# Altium PCB 电子脚铐便携式主控板V3-改版.PcbDoc (part 2 of 3)
Units mm, origin at the board's own origin, x right, y up, seen from the top; angles counter-clockwise.
Board outline 54 x 110 mm, 2 copper layers (Top Layer, Bottom Layer), stack 1.671 mm thick; 103 components, 64 nets, 340 pads, 43 vias.
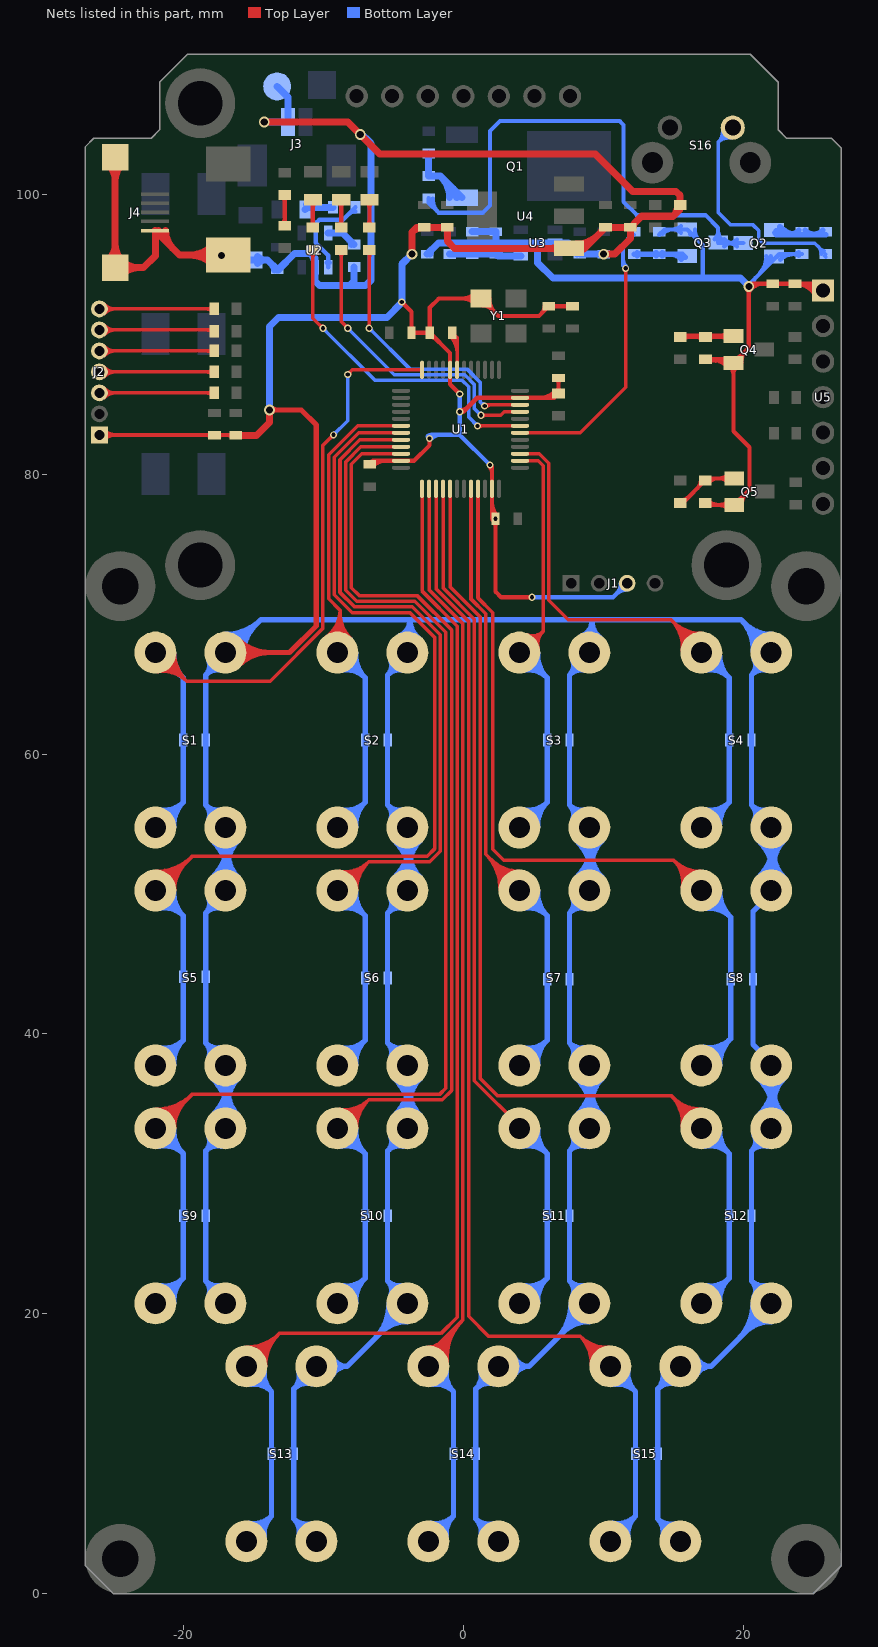
[diagram p2: the nets of this part, all layers, seen from the top]

## Via types
v1: diameter 0.508, hole 0.305, Top Layer to Bottom Layer, tented both sides, 29 vias
v2: diameter 0.762, hole 0.508, Top Layer to Bottom Layer, tented both sides, 14 vias

## Nets (pads, with @x,y where several pads share a name; then routed paths per layer and width w, separated by ;. In a path a pad name is that pad's centre, name@x,y a point inside that pad or via, vN(x,y) a via of type N, cw(c..) or ccw(c..) an arc to the next point about the centre after c; other vN are vias at no path point) (continued)
GND: C1.2 C2.2 C3.2 C4.2 C5.2 C6.2 C7.2 C8.2 C9.2 C10.2 C11.2 C12.2 C13.2 C14.2 C15.2 C16.2 C17.2 C18.2 C19.2 C20.2 C21.2 C22.2 C23.2 C24.2 C25.1 C26.2 C27.1 C28.2 C29.2 C30.2 C31.2 C32.2 C33.2 C34.2 C35.2 C36.1 D5.2 J1.3 J2.1 J3.2 J4.5 pad.@-13.3,107.7 Q2.2 Q3.2 Q4.2 Q5.2 R6.2 R13.1 R17.2 R19.2 R22.2 R23.2 R29.1 R31.1 S1.1 S2.1 S3.1 S4.1 S5.1 S6.1 S7.1 S8.1 S9.1 S10.1 S11.1 S12.1 S13.1 S14.1 S15.1 U1.8 U1.23 U1.35 U1.47 U2.2 U3.2 U4.1 U5.1 Y1.2 | length 1045
  Top Layer w0.305: J2.1@-26,82.8 C7.2@-16.4,82.8 ; J2.1@-25.683,82.484 cw(c-24.919,81.719) -24.919,82.8 cw(c-24.919,83.881) J2.1@-25.683,83.117 ; -18.368,82.8 cw(c-18.368,82.328) C6.2@-18.034,82.662 ; C6.2@-17.526,82.662 cw(c-17.192,82.328) -17.192,82.8 ; -16.844,82.8 cw(c-16.844,82.328) C7.2@-16.51,82.662 ; C4.2@-6.7,80.7 -6.45,80.95 U1.23@-4.45,80.95 -3.517,80.95 -2.413,82.054 v1(-2.413,82.55) ; C4.2@-6.661,80.811 cw(c-6.326,80.476) C4.2@-6.326,80.95 ; C4.2@-6.446,80.596 cw(c-5.59,79.74) -5.59,80.95 ; v1(-4.4,92.3) -3.7,91.6 C3.2@-3.7,90.1 C5.2@-2.4,90.1 ; C3.2@-3.804,90.354 ccw(c-4.056,90.606) -3.7,90.606 ccw(c-3.344,90.606) C3.2@-3.596,90.354 ; C3.2@-3.596,89.996 cw(c-3.344,89.744) -3.344,90.1 cw(c-3.344,90.456) C3.2@-3.596,90.204 ; C5.2@-2.504,89.996 ccw(c-2.756,89.744) -2.756,90.1 ccw(c-2.756,90.456) C5.2@-2.504,90.204 ; C5.2@-2.504,90.354 ccw(c-2.756,90.606) -2.4,90.606 ccw(c-2.044,90.606) C5.2@-2.296,90.354 ; C5.2@-2.4,89.802 cw(c-2.4,89.084) -1.892,89.592 ; v1(-0.254,84.455) 0,84.455 0.995,85.45 U1.47@4.05,85.45 6.488,85.45 R6.2@6.8,85.762 C1.2@6.8,86.862 ; v1@-0.254,84.557 ccw(c-0.254,85.415) 0.353,84.808 ; v1(-0.254,85.725) -0.95,86.421 U1.8@-0.95,87.45 -0.95,88.65 C5.2@-2.4,90.1 ; Y1.2@0.798,92.198 ccw(c-0.051,91.349) -0.051,92.55 ccw(c-0.051,93.751) Y1.2@0.798,92.902 ; Y1.2@1.35,92.052 cw(c1.35,91.093) 2.029,91.771 ; v1@1.833,80.573 cw(c1.31,80.05) 2.05,80.05 ; Y1.2@1.848,92.55 ccw(c3.29,92.55) 2.27,91.53 ; v1(1.905,80.645) 2.05,80.5 U1.35@2.05,78.95 2.05,77.05 v1(2.3,76.8) 2.3,71.6 2.7,71.2 v1(4.9,71.2) ; C2.2@2.044,77.09 ccw(c2.382,77.285) C2.2@2.317,76.9 ; C2.2@2.05,76.913 ccw(c2.413,76.913) C2.2@2.156,76.656 ; C2.2@2.05,77.174 ccw(c2.524,77.174) C2.2@2.189,76.839 ; 2.05,77.649 ccw(c3.149,77.649) C2.2@2.372,76.872 ; 2.05,77.91 ccw(c3.26,77.91) C2.2@2.404,77.054 ; C2.2@2.196,76.546 cw(c1.944,76.294) 2.3,76.294 cw(c2.656,76.294) C2.2@2.404,76.546 ; 5.47,85.45 ccw(c5.47,86.992) R6.2@6.56,85.902 ; 5.592,91.492 ccw(c5.084,92) C36.1@5.802,92 ; 6.206,85.45 ccw(c6.206,86.256) R6.2@6.776,85.686 ; C36.1@6.354,91.896 cw(c6.606,91.644) 6.606,92 cw(c6.606,92.356) C36.1@6.354,92.104 ; R6.2@6.66,85.902 ccw(c6.323,86.239) 6.8,86.239 ccw(c7.277,86.239) R6.2@6.94,85.902 ; C1.2@6.696,86.758 cw(c6.444,86.506) 6.8,86.506 cw(c7.156,86.506) C1.2@6.904,86.758 ; C25.1@7.546,91.896 ccw(c7.294,91.644) 7.294,92 ccw(c7.294,92.356) C25.1@7.546,92.104 ; C25.1@7.8,92 C36.1@6.1,92 5.4,91.3 2.5,91.3 Y1.2@1.25,92.55 -1.75,92.55 -2.4,91.9 C5.2@-2.4,90.1 ; R31.1@17.272,77.94 17.422,77.79 Q5.2@19.347,77.79 20.447,78.89 20.447,81.915 19.3,83.062 Q4.2@19.3,87.95 20.4,89.05 v2@20.4,93.298 ; R29.1@17.3,88.2 Q4.2@19.05,88.2 ; R29.1@17.499,88.029 cw(c17.851,87.419) 18.033,88.099 ; R31.1@17.512,78.08 ccw(c18.211,78.779) 18.211,77.79 ; R29.1@17.54,88.06 cw(c17.877,87.723) 17.877,88.2 cw(c17.877,88.677) R29.1@17.54,88.34 ; R29.1@17.657,88.2 cw(c17.657,86.507) Q4.2@18.854,87.704 ; 18.393,88.2 cw(c18.393,87.243) Q4.2@19.07,87.92 ; Q5.2@18.901,77.544 ccw(c18.308,76.951) 18.308,77.79 ccw(c18.308,78.629) Q5.2@18.901,78.036 ; Q4.2@19.054,87.704 cw(c18.461,87.111) 19.3,87.111 cw(c20.139,87.111) Q4.2@19.546,87.704 ; Q4.2@19.5,88.298 ccw(c19.5,88.654) Q4.2@19.752,88.402 ; Q5.2@19.547,78.138 ccw(c19.547,78.494) Q5.2@19.799,78.242 ; Q4.2@19.848,87.95 cw(c21.17,87.95) 20.235,88.885 ; Q5.2@19.895,77.79 cw(c21.217,77.79) 20.282,78.725 ; v2@20.238,93.238 cw(c19.848,92.848) 20.4,92.848 cw(c20.952,92.848) 20.562,93.238 cw(c21.435,92.365) 21.435,93.6 ; v2@20.702,93.6 C34.2@22.1,93.6 C35.2@23.7,93.6 ; C34.2@21.846,93.496 ccw(c21.594,93.244) 21.594,93.6 ccw(c21.594,93.956) C34.2@21.846,93.704 ; C34.2@22.354,93.496 cw(c22.606,93.244) 22.606,93.6 cw(c22.606,93.956) C34.2@22.354,93.704 ; C35.2@23.446,93.496 ccw(c23.194,93.244) 23.194,93.6 ccw(c23.194,93.956) C35.2@23.446,93.704 ; C35.2@23.954,93.496 cw(c24.206,93.244) 24.206,93.6 cw(c24.206,93.956) C35.2@23.954,93.704 ; 24.241,93.6 cw(c24.241,92.237) U5.1@25.407,92.943 ; 24.781,93.6 cw(c24.781,92.564) U5.1@25.667,93.1 ; U5.1@25.146,92.785 ccw(c23.7,91.91) C35.2@23.7,93.6 ; U5.1@25.7,93.12 25.22,93.6 C35.2@23.7,93.6
  Top Layer w0.381: S1.1@-16.808,67.25 -12.415,67.25 -10.502,69.163 -10.502,83.502 -11.582,84.582 v2(-13.843,84.582) ; S1.1@-16.343,66.593 cw(c-14.758,65.008) -14.758,67.25 cw(c-14.758,69.492) S1.1@-16.343,67.907 ; S1.1@-16.074,66.324 cw(c-13.839,64.089) -13.839,67.25 cw(c-13.839,70.411) S1.1@-16.074,68.176 ; v2@-13.708,84.447 cw(c-13.383,84.122) -13.383,84.582 cw(c-13.383,85.042) v2@-13.708,84.717
  Top Layer w0.508: J4.5@-25.371,95.242 ccw(c-26.559,96.43) -24.879,96.43 ccw(c-23.199,96.43) -24.387,95.242 ccw(c-23.199,96.43) -23.199,94.75 ccw(c-23.199,93.07) J4.5@-24.387,94.258 ; J4.5@-25.371,102.158 cw(c-26.559,100.97) -24.879,100.97 cw(c-23.199,100.97) J4.5@-24.387,102.158 ; J4.5@-24.879,102.65 J4.5@-24.879,94.75 -22.85,94.75 -22.004,95.596 J4.5@-22.004,97.383 ; J4.5@-22.021,97.4 J4.5@-22.004,97.383 ; J4.5@-21.783,97.4 ccw(c-21.208,97.4) -21.615,96.994 ; J4.5@-21.275,97.4 ccw(c-19.474,97.4) -20.748,96.126 ; D5.2@-17.854,94.946 ccw(c-19.555,93.245) -19.555,95.65 ccw(c-19.555,98.055) D5.2@-17.854,96.354 ; D5.2@-16.8,95.65 -20.271,95.65 J4.5@-22.004,97.383 ; C7.2@-16.256,82.766 -14.77,82.766 -13.843,83.693 v2(-13.843,84.582) ; v2(-14.224,105.156) -8.255,105.156 v2(-7.366,104.267) -5.969,102.87 9.43,102.87 12.1,100.2 15.194,100.2 15.494,99.9 R23.2@15.494,99.225 15.494,98.933 14.986,98.425 ; v2(-3.671,95.719) -3.671,97.294 ; C32.2@-2.946,97.579 ccw(c-2.981,96.604) -3.671,97.294 ; C33.2@-1.359,97.625 C32.2@-2.794,97.625 -3.34,97.625 -3.671,97.294 ; C33.2@-1.143,97.625 -1.143,96.647 -0.621,96.125 U4.1@7.545,96.125 8.66,96.125 ; U4.1@6.811,95.916 ccw(c6.305,95.41) 6.305,96.125 ccw(c6.305,96.84) U4.1@6.811,96.334 ; U4.1@8.07,95.913 ccw(c8.07,96.826) 8.715,96.18 ; U4.1@8.07,96.421 ccw(c8.07,98.56) 9.583,97.047 ; U4.1@8.307,95.948 cw(c8.66,95.685) 8.66,96.125 ; U4.1@8.307,96.302 ccw(c8.66,96.565) 8.66,96.125 ; 9.825,97.29 ccw(c9.491,97.625) C31.2@9.964,97.625 ; v2(10.024,95.719) 10.819,95.719 11.938,96.838 C30.2@11.938,97.625 ; C30.2@12.134,97.625 cw(c12.607,97.625) 12.273,97.96 ; R23.2@15.298,99.221 cw(c14.231,99.18) 14.986,98.425 ; v2@20.4,93.298 v2(20.4,93.4) ; 8.66,96.125 C31.2@10.16,97.625 C30.2@11.938,97.625 ; C30.2@11.938,97.625 12.738,98.425 14.986,98.425
  Bottom Layer w0.305: v1@-2.557,82.694 cw(c-2.29,82.427) -2.29,82.804 ; v1(-2.413,82.55) -2.159,82.804 -0.254,82.804 ; v1@-2.341,82.478 cw(c-1.555,81.692) -1.555,82.804 ; v1(-0.254,85.725) v1(-0.254,84.455) -0.254,82.804 ; v1(1.905,80.645) -0.254,82.804 ; v1(4.9,71.2) 10.7,71.2 J1.3@11.7,72.2 ; J1.3@11.252,72.2 cw(c10.172,72.2) 10.936,71.436 cw(c11.7,70.672) J1.3@11.7,71.752 ; R19.2@14,97.1 14.381,97.481 Q3.2@16,97.481 17.1,96.381 17.1,94 ; R19.2@14.24,97.179 cw(c14.967,96.452) 14.967,97.481 ; Q3.2@15.554,97.235 ccw(c14.961,96.641) 14.961,97.481 ccw(c14.961,98.32) Q3.2@15.554,97.726 ; Q3.2@16.2,97.133 cw(c16.2,96.777) Q3.2@16.452,97.029 ; Q3.2@16.548,97.481 ccw(c17.87,97.481) 16.935,96.546 ; v2(20.4,93.4) 20.4,93.55 22.569,95.719 R17.2@24.2,95.719 ; v2@20.629,93.4 cw(c21.543,93.4) 20.896,94.046 ; 21.119,94.269 ccw(c19.83,95.557) Q2.2@21.652,95.557 ; 21.639,94.789 ccw(c20.87,95.557) Q2.2@21.957,95.557 ; Q2.2@22.43,95.527 cw(c22.893,95.064) Q2.2@22.893,95.719 ; Q2.2@22.646,95.312 cw(c23.629,94.328) 23.629,95.719 ; R17.2@23.96,95.579 ccw(c23.623,95.242) 23.623,95.719 ccw(c23.623,96.196) R17.2@23.96,95.859
  Bottom Layer w0.381: S9.1@-18.203,21.267 ccw(c-19.11,21.656) -18.412,22.354 ; S9.1@-18.203,32.733 cw(c-19.11,32.344) -18.412,31.646 ; S5.1@-18.203,38.267 ccw(c-19.11,38.656) -18.412,39.354 ; S5.1@-18.203,49.733 cw(c-19.11,49.344) -18.412,48.646 ; S1.1@-18.203,55.267 ccw(c-19.11,55.656) -18.412,56.354 ; S1.1@-18.203,66.733 cw(c-19.11,66.344) -18.412,65.646 ; -18.014,21.956 cw(c-18.553,21.417) S9.1@-17.853,21.117 ; -18.014,32.044 ccw(c-18.553,32.583) S9.1@-17.853,32.883 ; -18.014,38.956 cw(c-18.553,38.417) S5.1@-17.853,38.117 ; -18.014,49.044 ccw(c-18.553,49.583) S5.1@-17.853,49.883 ; -18.014,55.956 cw(c-18.553,55.417) S1.1@-17.853,55.117 ; -18.014,66.044 ccw(c-18.553,66.583) S1.1@-17.853,66.883 ; S9.1@-17.926,34.176 ccw(c-20.625,36.875) S5.1@-16.808,36.875 ; S5.1@-17.926,36.824 cw(c-20.625,34.125) S9.1@-16.808,34.125 ; S5.1@-17.926,51.176 ccw(c-20.625,53.875) S1.1@-16.808,53.875 ; S1.1@-17.926,53.824 cw(c-20.625,51.125) S5.1@-16.808,51.125 ; S9.1@-17.657,33.907 ccw(c-19.705,35.955) -16.808,35.955 ; S5.1@-17.657,37.093 cw(c-19.705,35.045) -16.808,35.045 ; S5.1@-17.657,50.907 ccw(c-19.705,52.955) -16.808,52.955 ; S1.1@-17.657,54.093 cw(c-19.705,52.045) -16.808,52.045 ; S9.1@-17.387,33.637 ccw(c-18.785,35.035) -16.808,35.035 ; S5.1@-17.387,37.363 cw(c-18.785,35.965) -16.808,35.965 ; S5.1@-17.387,50.637 ccw(c-18.785,52.035) -16.808,52.035 ; S1.1@-17.387,54.363 cw(c-18.785,52.965) -16.808,52.965 ; S9.1@-17.38,34.503 ccw(c-17.526,34.981) -17.04,35.097 ccw(c-16.142,35.311) S9.1@-16.497,34.459 ; S5.1@-17.38,51.503 ccw(c-17.526,51.981) -17.04,52.097 ccw(c-16.142,52.311) S5.1@-16.497,51.459 ; S9.1@-17.287,22.028 cw(c-17.553,23.213) -18.412,22.354 ; S9.1@-17.287,31.972 ccw(c-17.553,30.787) -18.412,31.646 ; S5.1@-17.287,39.028 cw(c-17.553,40.213) -18.412,39.354 ; S5.1@-17.287,48.972 ccw(c-17.553,47.787) -18.412,48.646 ; S1.1@-17.287,56.028 cw(c-17.553,57.213) -18.412,56.354 ; S1.1@-17.287,65.972 ccw(c-17.553,64.787) -18.412,65.646 ; S1.1@-16.997,67.797 ccw(c-16.986,69.548) -15.748,68.31 ; S1.1@-16.994,68.178 ccw(c-16.978,70.83) -15.103,68.955 ; S1.1@-16.992,68.559 ccw(c-16.97,72.112) -14.458,69.6 ; S9.1@-16.808,20.75 -18.412,22.354 ; -16.808,35.028 ccw(c-15.222,35.028) S9.1@-16.343,33.907 ; -16.808,35.052 cw(c-14.302,35.052) S5.1@-16.074,36.824 ; -16.808,35.948 ccw(c-14.302,35.948) S9.1@-16.074,34.176 ; -16.808,35.972 cw(c-15.222,35.972) S5.1@-16.343,37.093 ; -16.808,52.028 ccw(c-15.222,52.028) S5.1@-16.343,50.907 ; -16.808,52.052 cw(c-14.302,52.052) S1.1@-16.074,53.824 ; -16.808,52.948 ccw(c-14.302,52.948) S5.1@-16.074,51.176 ; -16.808,52.972 cw(c-15.222,52.972) S1.1@-16.343,54.093 ; S1.1@-16.071,67.25 cw(c-14.293,67.25) -15.551,68.507 ; S1.1@-15.69,67.25 cw(c-12.993,67.25) -14.9,69.158 ; S13.1@-11.765,4.089 ccw(c-13.03,4.428) -12.104,5.354 ; S13.1@-11.765,15.911 cw(c-13.03,15.572) -12.104,14.646 ; S13.1@-11.397,3.99 ccw(c-12.294,4.231) -11.637,4.887 ccw(c-10.981,5.544) S13.1@-10.74,4.647 ; S13.1@-11.397,16.01 cw(c-12.294,15.769) -11.637,15.113 cw(c-10.981,14.456) S13.1@-10.74,15.353 ; S13.1@-10.839,5.015 cw(c-11.178,6.28) -12.104,5.354 ; S13.1@-10.839,14.985 ccw(c-11.178,13.72) -12.104,14.646 ; S13.1@-10.5,3.75 -12.104,5.354 ; S13.1@-9.682,15.81 cw(c-8.946,15.414) -8.946,16.25 cw(c-8.946,17.086) S13.1@-9.682,16.69 ; S13.1@-9.347,15.629 cw(c-8.308,15.07) -8.308,16.25 ; S13.1@-9.347,16.871 ccw(c-8.308,17.43) -8.308,16.25 ; -6.371,18.187 ccw(c-8.934,20.75) S10.1@-5.309,20.75 ; -5.908,18.65 cw(c-4,16.743) S10.1@-4,19.441 ; -5.721,18.837 ccw(c-7.634,20.75) S10.1@-4.928,20.75 ; -5.257,19.301 cw(c-4,18.043) S10.1@-4,19.822 ; S10.1@-5.203,21.267 ccw(c-6.11,21.656) -5.412,22.354 ; S10.1@-5.203,32.733 cw(c-6.11,32.344) -5.412,31.646 ; S6.1@-5.203,38.267 ccw(c-6.11,38.656) -5.412,39.354 ; S6.1@-5.203,49.733 cw(c-6.11,49.344) -5.412,48.646 ; S2.1@-5.203,55.267 ccw(c-6.11,55.656) -5.412,56.354 ; S2.1@-5.203,66.733 cw(c-6.11,66.344) -5.412,65.646 ; -5.07,19.488 ccw(c-6.333,20.75) S10.1@-4.547,20.75 ; -5.014,21.956 cw(c-5.553,21.417) S10.1@-4.853,21.117 ; -5.014,32.044 ccw(c-5.553,32.583) S10.1@-4.853,32.883 ; -5.014,38.956 cw(c-5.553,38.417) S6.1@-4.853,38.117 ; -5.014,49.044 ccw(c-5.553,49.583) S6.1@-4.853,49.883 ; -5.014,55.956 cw(c-5.553,55.417) S2.1@-4.853,55.117 ; -5.014,66.044 ccw(c-5.553,66.583) S2.1@-4.853,66.883 ; S10.1@-4.926,34.176 ccw(c-7.625,36.875) S6.1@-3.808,36.875 ; S6.1@-4.926,36.824 cw(c-7.625,34.125) S10.1@-3.808,34.125 ; S6.1@-4.926,51.176 ccw(c-7.625,53.875) S2.1@-3.808,53.875 ; S2.1@-4.926,53.824 cw(c-7.625,51.125) S6.1@-3.808,51.125 ; S10.1@-4.657,33.907 ccw(c-6.705,35.955) -3.808,35.955 ; S6.1@-4.657,37.093 cw(c-6.705,35.045) -3.808,35.045 ; S6.1@-4.657,50.907 ccw(c-6.705,52.955) -3.808,52.955 ; S2.1@-4.657,54.093 cw(c-6.705,52.045) -3.808,52.045 ; S2.1@-4.547,68.44 ccw(c-5.076,69.592) -3.808,69.592 ; S2.1@-4.388,68.094 ccw(c-4.803,68.998) -3.808,68.998 ; S10.1@-4.387,33.637 ccw(c-5.785,35.035) -3.808,35.035 ; S6.1@-4.387,37.363 cw(c-5.785,35.965) -3.808,35.965 ; S6.1@-4.387,50.637 ccw(c-5.785,52.035) -3.808,52.035 ; S2.1@-4.387,54.363 cw(c-5.785,52.965) -3.808,52.965 ; S10.1@-4.38,34.503 ccw(c-4.526,34.981) -4.04,35.097 ccw(c-3.142,35.311) S10.1@-3.497,34.459 ; S6.1@-4.38,51.503 ccw(c-4.526,51.981) -4.04,52.097 ccw(c-3.142,52.311) S6.1@-3.497,51.459 ; S10.1@-4.287,22.028 cw(c-4.553,23.213) -5.412,22.354 ; S10.1@-4.287,31.972 ccw(c-4.553,30.787) -5.412,31.646 ; S6.1@-4.287,39.028 cw(c-4.553,40.213) -5.412,39.354 ; S6.1@-4.287,48.972 ccw(c-4.553,47.787) -5.412,48.646 ; S2.1@-4.287,56.028 cw(c-4.553,57.213) -5.412,56.354 ; S2.1@-4.287,65.972 ccw(c-4.553,64.787) -5.412,65.646 ; -3.808,35.028 ccw(c-2.222,35.028) S10.1@-3.343,33.907 ; -3.808,35.052 cw(c-1.302,35.052) S6.1@-3.074,36.824 ; -3.808,35.948 ccw(c-1.302,35.948) S10.1@-3.074,34.176 ; -3.808,35.972 cw(c-2.222,35.972) S6.1@-3.343,37.093 ; -3.808,52.028 ccw(c-2.222,52.028) S6.1@-3.343,50.907 ; -3.808,52.052 cw(c-1.302,52.052) S2.1@-3.074,53.824 ; -3.808,52.948 ccw(c-1.302,52.948) S6.1@-3.074,51.176 ; -3.808,52.972 cw(c-2.222,52.972) S2.1@-3.343,54.093 ; -3.808,68.793 ccw(c-2.751,68.793) S2.1@-3.416,67.972 ; S2.1@-3.176,68.268 cw(c-2.105,69.592) -3.808,69.592 ; S14.1@1.235,4.089 ccw(c-0.03,4.428) 0.896,5.354 ; S14.1@1.235,15.911 cw(c-0.03,15.572) 0.896,14.646 ; S14.1@1.603,3.99 ccw(c0.706,4.231) 1.363,4.887 ccw(c2.019,5.544) S14.1@2.26,4.647 ; S14.1@1.603,16.01 cw(c0.706,15.769) 1.363,15.113 cw(c2.019,14.456) S14.1@2.26,15.353 ; S14.1@2.161,5.015 cw(c1.822,6.28) 0.896,5.354 ; S14.1@2.161,14.985 ccw(c1.822,13.72) 0.896,14.646 ; S14.1@2.5,3.75 0.896,5.354 ; S14.1@3.318,15.81 cw(c4.054,15.414) 4.054,16.25 cw(c4.054,17.086) S14.1@3.318,16.69 ; S14.1@3.653,15.629 cw(c4.692,15.07) 4.692,16.25 ; S14.1@3.653,16.871 ccw(c4.692,17.43) 4.692,16.25 ; 6.629,18.187 ccw(c4.066,20.75) S11.1@7.691,20.75 ; 7.092,18.65 cw(c9,16.743) S11.1@9,19.441 ; 7.279,18.837 ccw(c5.366,20.75) S11.1@8.072,20.75 ; 7.743,19.301 cw(c9,18.043) S11.1@9,19.822 ; S11.1@7.797,21.267 ccw(c6.89,21.656) 7.588,22.354 ; S11.1@7.797,32.733 cw(c6.89,32.344) 7.588,31.646 ; S7.1@7.797,38.267 ccw(c6.89,38.656) 7.588,39.354 ; S7.1@7.797,49.733 cw(c6.89,49.344) 7.588,48.646 ; S3.1@7.797,55.267 ccw(c6.89,55.656) 7.588,56.354 ; S3.1@7.797,66.733 cw(c6.89,66.344) 7.588,65.646 ; 7.93,19.488 ccw(c6.667,20.75) S11.1@8.453,20.75 ; 7.986,21.956 cw(c7.447,21.417) S11.1@8.147,21.117 ; 7.986,32.044 ccw(c7.447,32.583) S11.1@8.147,32.883 ; 7.986,38.956 cw(c7.447,38.417) S7.1@8.147,38.117 ; 7.986,49.044 ccw(c7.447,49.583) S7.1@8.147,49.883 ; 7.986,55.956 cw(c7.447,55.417) S3.1@8.147,55.117 ; 7.986,66.044 ccw(c7.447,66.583) S3.1@8.147,66.883 ; S11.1@8.074,34.176 ccw(c5.375,36.875) S7.1@9.192,36.875 ; S7.1@8.074,36.824 cw(c5.375,34.125) S11.1@9.192,34.125 ; S7.1@8.074,51.176 ccw(c5.375,53.875) S3.1@9.192,53.875 ; S3.1@8.074,53.824 cw(c5.375,51.125) S7.1@9.192,51.125 ; S11.1@8.343,33.907 ccw(c6.295,35.955) 9.192,35.955 ; S7.1@8.343,37.093 cw(c6.295,35.045) 9.192,35.045 ; S7.1@8.343,50.907 ccw(c6.295,52.955) 9.192,52.955 ; S3.1@8.343,54.093 cw(c6.295,52.045) 9.192,52.045 ; S3.1@8.501,68.461 ccw(c8.077,69.492) 9.192,69.492 ; S11.1@8.613,33.637 ccw(c7.215,35.035) 9.192,35.035 ; S7.1@8.613,37.363 cw(c7.215,35.965) 9.192,35.965 ; S7.1@8.613,50.637 ccw(c7.215,52.035) 9.192,52.035 ; S3.1@8.613,54.363 cw(c7.215,52.965) 9.192,52.965 ; S11.1@8.62,34.503 ccw(c8.474,34.981) 8.96,35.097 ccw(c9.858,35.311) S11.1@9.503,34.459 ; S7.1@8.62,51.503 ccw(c8.474,51.981) 8.96,52.097 ccw(c9.858,52.311) S7.1@9.503,51.459 ; S3.1@8.647,68.109 ccw(c8.311,68.923) 9.192,68.923 ; S11.1@8.713,22.028 cw(c8.447,23.213) 7.588,22.354 ; S11.1@8.713,31.972 ccw(c8.447,30.787) 7.588,31.646 ; S7.1@8.713,39.028 cw(c8.447,40.213) 7.588,39.354 ; S7.1@8.713,48.972 ccw(c8.447,47.787) 7.588,48.646 ; S3.1@8.713,56.028 cw(c8.447,57.213) 7.588,56.354 ; S3.1@8.713,65.972 ccw(c8.447,64.787) 7.588,65.646 ; 9.192,35.028 ccw(c10.778,35.028) S11.1@9.657,33.907 ; 9.192,35.052 cw(c11.698,35.052) S7.1@9.926,36.824 ; 9.192,35.948 ccw(c11.698,35.948) S11.1@9.926,34.176 ; 9.192,35.972 cw(c10.778,35.972) S7.1@9.657,37.093 ; 9.192,52.028 ccw(c10.778,52.028) S7.1@9.657,50.907 ; 9.192,52.052 cw(c11.698,52.052) S3.1@9.926,53.824 ; 9.192,52.948 ccw(c11.698,52.948) S7.1@9.926,51.176 ; 9.192,52.972 cw(c10.778,52.972) S3.1@9.657,54.093 ; S3.1@9.788,68.296 cw(c10.69,69.492) 9.192,69.492 ; S15.1@14.235,4.089 ccw(c12.97,4.428) 13.896,5.354 ; S15.1@14.235,15.911 cw(c12.97,15.572) 13.896,14.646 ; S15.1@14.603,3.99 ccw(c13.706,4.231) 14.363,4.887 ccw(c15.019,5.544) S15.1@15.26,4.647 ; S15.1@14.603,16.01 cw(c13.706,15.769) 14.363,15.113 cw(c15.019,14.456) S15.1@15.26,15.353 ; S15.1@15.161,5.015 cw(c14.822,6.28) 13.896,5.354 ; S15.1@15.161,14.985 ccw(c14.822,13.72) 13.896,14.646 ; S15.1@15.5,3.75 13.896,5.354 ; S15.1@16.318,15.81 cw(c17.054,15.414) 17.054,16.25 cw(c17.054,17.086) S15.1@16.318,16.69 ; S15.1@16.653,15.629 cw(c17.692,15.07) 17.692,16.25 ; S15.1@16.653,16.871 ccw(c17.692,17.43) 17.692,16.25 ; 19.629,18.187 ccw(c17.066,20.75) S12.1@20.691,20.75 ; 20.092,18.65 cw(c22,16.743) S12.1@22,19.441 ; 20.092,69.35 ccw(c22,71.257) S4.1@22,68.56 ; 20.279,18.837 ccw(c18.366,20.75) S12.1@21.072,20.75 ; 20.436,69.006 cw(c18.886,67.456) S4.1@21.074,67.311 ; S4.1@20.693,67.336 ccw(c17.772,67.529) 19.842,69.6 ; 20.743,19.301 cw(c22,18.043) S12.1@22,19.822 ; 20.743,68.699 ccw(c22,69.957) S4.1@22,68.179 ; S12.1@20.797,21.267 ccw(c19.89,21.656) 20.588,22.354 ; S12.1@20.797,32.733 cw(c19.89,32.344) 20.588,31.646 ; S4.1@20.797,55.267 ccw(c19.89,55.656) 20.588,56.354 ; S4.1@20.797,66.733 cw(c19.89,66.344) 20.588,65.646 ; 20.93,19.488 ccw(c19.667,20.75) S12.1@21.453,20.75 ; 20.986,21.956 cw(c20.447,21.417) S12.1@21.147,21.117 ; 20.986,32.044 ccw(c20.447,32.583) S12.1@21.147,32.883 ; 20.986,55.956 cw(c20.447,55.417) S4.1@21.147,55.117 ; 20.986,66.044 ccw(c20.447,66.583) S4.1@21.147,66.883 ; 21.03,68.412 cw(c20.001,67.382) S4.1@21.454,67.286 ; S12.1@21.074,34.176 ccw(c18.375,36.875) S8.1@22.192,36.875 ; S8.1@21.074,36.824 cw(c18.375,34.125) S12.1@22.192,34.125 ; S8.1@21.074,51.176 ccw(c18.375,53.875) S4.1@22.192,53.875 ; S4.1@21.074,53.824 cw(c18.375,51.125) S8.1@22.192,51.125 ; S12.1@21.343,33.907 ccw(c19.295,35.955) 22.192,35.955 ; S8.1@21.343,37.093 cw(c19.295,35.045) 22.192,35.045 ; S8.1@21.343,50.907 ccw(c19.295,52.955) 22.192,52.955 ; S4.1@21.343,54.093 cw(c19.295,52.045) 22.192,52.045 ; S12.1@21.613,33.637 ccw(c20.215,35.035) 22.192,35.035 ; S8.1@21.613,37.363 cw(c20.215,35.965) 22.192,35.965 ; S8.1@21.613,50.637 ccw(c20.215,52.035) 22.192,52.035 ; S4.1@21.613,54.363 cw(c20.215,52.965) 22.192,52.965 ; S12.1@21.62,34.503 ccw(c21.474,34.981) 21.96,35.097 ccw(c22.858,35.311) S12.1@22.503,34.459 ; S8.1@21.62,51.503 ccw(c21.474,51.981) 21.96,52.097 ccw(c22.858,52.311) S8.1@22.503,51.459 ; S12.1@21.713,22.028 cw(c21.447,23.213) 20.588,22.354 ; S12.1@21.713,31.972 ccw(c21.447,30.787) 20.588,31.646 ; S4.1@21.713,56.028 cw(c21.447,57.213) 20.588,56.354 ; S4.1@21.713,65.972 ccw(c21.447,64.787) 20.588,65.646 ; 22.192,35.028 ccw(c23.778,35.028) S12.1@22.657,33.907 ; 22.192,35.052 cw(c24.698,35.052) S8.1@22.926,36.824 ; 22.192,35.948 ccw(c24.698,35.948) S12.1@22.926,34.176 ; 22.192,35.972 cw(c23.778,35.972) S8.1@22.657,37.093 ; 22.192,52.028 ccw(c23.778,52.028) S8.1@22.657,50.907 ; 22.192,52.052 cw(c24.698,52.052) S4.1@22.926,53.824 ; 22.192,52.948 ccw(c24.698,52.948) S8.1@22.926,51.176 ; 22.192,52.972 cw(c23.778,52.972) S4.1@22.657,54.093 ; -18.412,22.354 C16.2@-18.412,27 -18.412,31.646 ; -18.412,31.646 -16.808,33.25 -16.808,37.75 -18.412,39.354 ; -18.412,39.354 C12.2@-18.412,44.1 -18.412,48.646 ; -18.412,48.646 -16.808,50.25 -16.808,54.75 -18.412,56.354 ; -18.412,56.354 C8.2@-18.412,61 -18.412,65.646 ; -18.412,65.646 -14.458,69.6 ; -14.458,69.6 19.842,69.6 ; -12.104,5.354 C20.2@-12.104,10 -12.104,14.646 ; -12.104,14.646 S13.1@-10.5,16.25 -8.308,16.25 ; -8.308,16.25 -3.808,20.75 -5.412,22.354 ; -5.412,22.354 C17.2@-5.412,27 -5.412,31.646 ; -5.412,31.646 -3.808,33.25 -3.808,37.75 -5.412,39.354 ; -5.412,39.354 C13.2@-5.412,44 -5.412,48.646 ; -5.412,48.646 -3.808,50.25 -3.808,54.75 -5.412,56.354 ; -5.412,56.354 C9.2@-5.412,61 -5.412,65.646 ; -5.412,65.646 -3.808,67.25 -3.808,69.592 ; 0.896,5.354 C21.2@0.896,10 0.896,14.646 ; 0.896,14.646 S14.1@2.5,16.25 4.692,16.25 ; 4.692,16.25 9.192,20.75 7.588,22.354 ; 7.588,22.354 C18.2@7.588,27 7.588,31.646 ; 7.588,31.646 9.192,33.25 9.192,37.75 7.588,39.354 ; 7.588,39.354 C14.2@7.588,43.9 7.588,48.646 ; 7.588,48.646 9.192,50.25 9.192,54.75 7.588,56.354 ; 7.588,56.354 C10.2@7.588,61 7.588,65.646 ; 7.588,65.646 9.192,67.25 9.192,69.492 ; 13.896,5.354 C22.2@13.896,10 13.896,14.646 ; 13.896,14.646 S15.1@15.5,16.25 17.692,16.25 ; 17.692,16.25 22.192,20.75 20.588,22.354 ; 19.842,69.6 22.192,67.25 20.588,65.646 ; 20.588,22.354 C19.2@20.588,27 20.588,31.646 ; 20.588,31.646 22.192,33.25 22.192,37.75 20.7,39.242 C15.2@20.7,43.9 20.7,48.758 22.192,50.25 22.192,54.75 20.588,56.354 ; 20.588,56.354 C11.2@20.588,61 20.588,65.646
  Bottom Layer w0.508: v2(-17.272,95.631) -16.941,95.3 -14,95.3 C24.2@-13.3,94.6 -13.223,94.6 -12.065,95.758 -10.922,95.758 ; v2@-17.182,95.721 ccw(c-16.166,96.737) -16.166,95.3 ; C23.2@-15.695,95.055 ccw(c-16.285,94.465) -16.285,95.3 ccw(c-16.285,96.135) C23.2@-15.695,95.545 ; C23.2@-14.705,95.055 cw(c-14.115,94.465) -14.115,95.3 cw(c-14.115,96.135) C23.2@-14.705,95.545 ; v2@-14.218,105.15 J3.2@-12.525,105.15 -12.525,106.925 pad.@-13.3,107.7 ; v2(-13.843,84.582) -13.843,90.551 -13.208,91.186 -5.461,91.186 -4.394,92.253 -4.394,94.996 v2(-3.671,95.719) ; -13.635,94.935 cw(c-13.969,94.6) C24.2@-13.496,94.6 ; U2.2@-10.646,95.004 ccw(c-11.597,95.083) -10.922,95.758 ; R13.1@-7.8,94.8 -7.8,93.8 -8.128,93.472 ; v2@-7.366,104.14 cw(c-7.366,103.527) -6.932,103.96 ; v2(-7.366,104.267) -7.239,104.267 -6.604,103.632 -6.604,93.853 -6.985,93.472 -8.128,93.472 ; C28.2@-2.576,95.719 -1.775,96.52 5.3,96.52 ; C28.2@-2.38,95.719 cw(c-1.907,95.719) -2.241,96.054 ; R22.2@0.624,97.319 C29.2@2.324,97.319 2.324,96.583 ; 7.989,96.054 cw(c7.655,95.719) C27.1@8.128,95.719 ; v2(10.024,95.719) C27.1@8.324,95.719 7.524,96.519 U3.2@6.549,96.519 U3.2@6.549,96.519 5.3,96.52 ; v2(20.4,93.4) 19.8,94 17.1,94 6.4,94 5.3,95.1 5.3,96.52 ; -10.922,95.758 -10.6,95.436 U2.2@-10.6,94.775 -10.6,93.785 -10.287,93.472 -8.128,93.472
KEY1: C8.1 S1.2 U1.12 | length 79.5
  Top Layer w0.254: S1.2@-21.916,66.645 cw(c-21.742,65.384) -20.842,66.284 ; S1.2@-21.882,66.393 cw(c-21.654,64.749) -20.481,65.923 ; S1.2@-21.847,66.142 cw(c-21.567,64.114) -20.119,65.561 ; S1.2@-21.812,65.89 cw(c-21.479,63.479) -19.758,65.2 ; S1.2@-21.808,67.25 -19.758,65.2 ; S1.2@-21.135,67.25 ccw(c-19.51,67.25) -20.659,66.101 ; S1.2@-20.881,67.25 ccw(c-18.643,67.25) -20.226,65.668 ; S1.2@-20.627,67.25 ccw(c-17.776,67.25) -19.792,65.234 ; v1@-9.398,82.804 cw(c-9.705,82.804) -9.488,82.587 cw(c-9.271,82.37) v1@-9.271,82.677 ; v1(-9.271,82.804) -10.032,82.043 -10.032,68.968 -13.8,65.2 -19.758,65.2 ; v1(-8.255,87.122) -7.927,87.45 U1.12@-2.95,87.45 ; v1@-8.255,87.249 ccw(c-8.255,87.556) -8.038,87.339 ccw(c-7.821,87.122) v1@-8.128,87.122
  Bottom Layer w0.254: v1(-9.271,82.804) -8.255,83.82 v1(-8.255,87.122) ; v1@-9.271,82.931 ccw(c-9.271,83.238) -9.054,83.021 ccw(c-8.837,82.804) v1@-9.144,82.804 ; v1@-8.345,87.032 cw(c-8.562,86.815) -8.255,86.815 cw(c-7.948,86.815) v1@-8.165,87.032
  Bottom Layer w0.381: S1.2@-21.811,55.659 ccw(c-21.52,57.056) -20.511,56.047 ; S1.2@-21.811,66.341 cw(c-21.52,64.944) -20.511,65.953 ; S1.2@-21.808,54.75 -20.012,56.546 ; S1.2@-21.808,67.25 -20.012,65.454 ; S1.2@-21.733,56.032 ccw(c-21.348,57.882) -20.012,56.546 ; S1.2@-21.733,65.968 cw(c-21.348,64.118) -20.012,65.454 ; S1.2@-21.072,54.788 cw(c-19.546,54.852) -20.626,55.932 ; S1.2@-21.072,67.212 ccw(c-19.546,67.148) -20.626,66.068 ; S1.2@-20.692,54.804 cw(c-18.367,54.901) -20.012,56.546 ; S1.2@-20.692,67.196 ccw(c-18.367,67.099) -20.012,65.454 ; -20.012,56.546 C8.1@-20.012,61 -20.012,65.454
KEY2: C9.1 S2.2 U1.18 | length 59.2
  Top Layer w0.254: S2.2@-9.794,68.371 ccw(c-11.143,70.276) -8.808,70.276 ; S2.2@-9.647,68.163 ccw(c-10.795,69.785) -8.808,69.785 ; S2.2@-9.5,67.956 ccw(c-10.447,69.294) -8.808,69.294 ; S2.2@-9.353,67.749 ccw(c-10.099,68.803) -8.808,68.803 ; S2.2@-8.808,67.25 -8.808,70.276 ; -8.808,68.875 ccw(c-7.375,68.875) S2.2@-8.388,67.862 ; -8.808,69.488 ccw(c-6.762,69.488) S2.2@-8.209,68.041 ; -8.808,70.101 ccw(c-6.149,70.101) S2.2@-8.029,68.221 ; U1.18@-4.45,83.45 -7.549,83.45 -9.626,81.373 -9.626,71.094 -8.808,70.276
  Bottom Layer w0.381: S2.2@-8.811,55.659 ccw(c-8.52,57.056) -7.511,56.047 ; S2.2@-8.811,66.341 cw(c-8.52,64.944) -7.511,65.953 ; S2.2@-8.808,54.75 -7.012,56.546 ; S2.2@-8.808,67.25 -7.012,65.454 ; S2.2@-8.733,56.032 ccw(c-8.348,57.882) -7.012,56.546 ; S2.2@-8.733,65.968 cw(c-8.348,64.118) -7.012,65.454 ; S2.2@-8.072,54.788 cw(c-6.546,54.852) -7.626,55.932 ; S2.2@-8.072,67.212 ccw(c-6.546,67.148) -7.626,66.068 ; S2.2@-7.692,54.804 cw(c-5.367,54.901) -7.012,56.546 ; S2.2@-7.692,67.196 ccw(c-5.367,67.099) -7.012,65.454 ; -7.012,56.546 C9.1@-7.012,61 -7.012,65.454
KEY3: C10.1 S3.2 U1.38 | length 48.3
  Top Layer w0.254: U1.38@4.05,80.95 5.35,80.95 5.7,80.6 5.7,68.758 ; S3.2@4.192,67.25 5.7,68.758 ; S3.2@4.328,68.051 ccw(c4.618,68.76) 5.16,68.218 ; S3.2@4.424,68.286 ccw(c4.775,69.143) 5.43,68.488 ; S3.2@4.52,68.521 ccw(c4.932,69.526) 5.7,68.758 ; S3.2@5.094,67.487 cw(c6.096,67.704) 5.371,68.429 ; S3.2@5.342,67.541 cw(c6.637,67.821) 5.7,68.758
  Bottom Layer w0.381: S3.2@4.189,55.659 ccw(c4.48,57.056) 5.489,56.047 ; S3.2@4.189,66.341 cw(c4.48,64.944) 5.489,65.953 ; S3.2@4.192,54.75 5.988,56.546 ; S3.2@4.192,67.25 5.988,65.454 ; S3.2@4.267,56.032 ccw(c4.652,57.882) 5.988,56.546 ; S3.2@4.267,65.968 cw(c4.652,64.118) 5.988,65.454 ; S3.2@4.928,54.788 cw(c6.454,54.852) 5.374,55.932 ; S3.2@4.928,67.212 ccw(c6.454,67.148) 5.374,66.068 ; S3.2@5.308,54.804 cw(c7.633,54.901) 5.988,56.546 ; S3.2@5.308,67.196 ccw(c7.633,67.099) 5.988,65.454 ; 5.988,56.546 C10.1@5.988,61 5.988,65.454
KEY4: C11.1 S4.2 U1.39 | length 64.3
  Top Layer w0.254: U1.39@4.05,81.45 5.425,81.45 6.106,80.768 6.106,70.994 7.5,69.6 14.842,69.6 ; 14.984,69.458 ccw(c17,71.474) S4.2@17,68.623 ; 15.222,69.22 cw(c13.589,67.588) S4.2@15.886,67.36 ; 15.417,69.024 ccw(c17,70.607) S4.2@17,68.369 ; 15.601,68.841 cw(c14.28,67.52) S4.2@16.139,67.335 ; S4.2@15.634,67.385 ccw(c12.899,67.656) 14.842,69.6 ; 15.851,68.591 ccw(c17,69.74) S4.2@17,68.115 ; 15.98,68.462 cw(c14.97,67.451) S4.2@16.392,67.31 ; S4.2@17.192,67.25 14.842,69.6
  Bottom Layer w0.381: S4.2@17.189,55.659 ccw(c17.48,57.056) 18.489,56.047 ; S4.2@17.189,66.341 cw(c17.48,64.944) 18.489,65.953 ; S4.2@17.192,54.75 18.988,56.546 ; S4.2@17.192,67.25 18.988,65.454 ; S4.2@17.267,56.032 ccw(c17.652,57.882) 18.988,56.546 ; S4.2@17.267,65.968 cw(c17.652,64.118) 18.988,65.454 ; S4.2@17.928,54.788 cw(c19.454,54.852) 18.374,55.932 ; S4.2@17.928,67.212 ccw(c19.454,67.148) 18.374,66.068 ; S4.2@18.308,54.804 cw(c20.633,54.901) 18.988,56.546 ; S4.2@18.308,67.196 ccw(c20.633,67.099) 18.988,65.454 ; 18.988,56.546 C11.1@18.988,61 18.988,65.454
KEY5: C12.1 S5.2 U1.19 | length 100.9
  Top Layer w0.254: S5.2@-21.996,50.861 ccw(c-21.984,52.76) -20.641,51.417 ; S5.2@-21.994,51.115 ccw(c-21.978,53.614) -20.211,51.847 ; S5.2@-21.993,51.369 ccw(c-21.973,54.468) -19.781,52.277 ; S5.2@-21.991,51.623 ccw(c-21.967,55.322) -19.352,52.706 ; S5.2@-21.808,50.25 -19.352,52.706 ; S5.2@-21.135,50.25 cw(c-19.51,50.25) -20.659,51.399 ; S5.2@-20.881,50.25 cw(c-18.643,50.25) -20.226,51.832 ; S5.2@-20.627,50.25 cw(c-17.776,50.25) -19.792,52.266 ; U1.19@-4.45,82.95 -7.474,82.95 -9.219,81.205 -9.219,71.376 -7.947,70.104 -3.81,70.104 -2.058,68.352 -2.058,53.217 -2.568,52.706 -19.352,52.706
  Bottom Layer w0.381: S5.2@-21.811,38.659 ccw(c-21.52,40.056) -20.511,39.047 ; S5.2@-21.811,49.341 cw(c-21.52,47.944) -20.511,48.953 ; S5.2@-21.808,37.75 -20.012,39.546 ; S5.2@-21.808,50.25 -20.012,48.454 ; S5.2@-21.733,39.032 ccw(c-21.348,40.882) -20.012,39.546 ; S5.2@-21.733,48.968 cw(c-21.348,47.118) -20.012,48.454 ; S5.2@-21.072,37.788 cw(c-19.546,37.852) -20.626,38.932 ; S5.2@-21.072,50.212 ccw(c-19.546,50.148) -20.626,49.068 ; S5.2@-20.692,37.804 cw(c-18.367,37.901) -20.012,39.546 ; S5.2@-20.692,50.196 ccw(c-18.367,50.099) -20.012,48.454 ; -20.012,39.546 C12.1@-20.012,44.1 -20.012,48.454
KEY6: C13.1 S6.2 U1.20 | length 85.7
  Top Layer w0.254: S6.2@-8.916,50.855 ccw(c-8.742,52.116) -7.842,51.216 ; S6.2@-8.882,51.107 ccw(c-8.654,52.751) -7.481,51.577 ; S6.2@-8.847,51.358 ccw(c-8.567,53.386) -7.119,51.939 ; S6.2@-8.812,51.61 ccw(c-8.479,54.021) -6.758,52.3 ; S6.2@-8.808,50.25 -6.758,52.3 ; S6.2@-8.135,50.25 cw(c-6.51,50.25) -7.659,51.399 ; S6.2@-7.881,50.25 cw(c-5.643,50.25) -7.226,51.832 ; S6.2@-7.627,50.25 cw(c-4.776,50.25) -6.792,52.266 ; U1.20@-4.45,82.45 -7.399,82.45 -8.813,81.037 -8.813,71.544 -7.779,70.51 -3.642,70.51 -1.651,68.52 -1.651,53.049 -2.4,52.3 -6.758,52.3
  Bottom Layer w0.381: S6.2@-8.811,38.659 ccw(c-8.52,40.056) -7.511,39.047 ; S6.2@-8.811,49.341 cw(c-8.52,47.944) -7.511,48.953 ; S6.2@-8.808,37.75 -7.012,39.546 ; S6.2@-8.808,50.25 -7.012,48.454 ; S6.2@-8.733,39.032 ccw(c-8.348,40.882) -7.012,39.546 ; S6.2@-8.733,48.968 cw(c-8.348,47.118) -7.012,48.454 ; S6.2@-8.072,37.788 cw(c-6.546,37.852) -7.626,38.932 ; S6.2@-8.072,50.212 ccw(c-6.546,50.148) -7.626,49.068 ; S6.2@-7.692,37.804 cw(c-5.367,37.901) -7.012,39.546 ; S6.2@-7.692,50.196 ccw(c-5.367,50.099) -7.012,48.454 ; -7.012,39.546 C13.1@-7.012,44 -7.012,48.454
KEY7: C14.1 S7.2 U1.32 | length 71
  Top Layer w0.254: U1.32@0.55,78.95 0.55,71.075 1.6,70.025 1.6,52.842 ; 1.984,52.458 ccw(c4,54.474) S7.2@4,51.623 ; 2.02,52.422 cw(c-0.06,50.341) S7.2@2.881,50.275 ; 2.417,52.024 ccw(c4,53.607) S7.2@4,51.369 ; 2.44,52.001 cw(c0.762,50.323) S7.2@3.135,50.269 ; S7.2@2.627,50.281 ccw(c-0.882,50.36) 1.6,52.842 ; 2.851,51.591 ccw(c4,52.74) S7.2@4,51.115 ; 2.861,51.581 cw(c1.584,50.304) S7.2@3.389,50.264 ; S7.2@4.192,50.25 1.6,52.842
  Bottom Layer w0.381: S7.2@4.189,38.659 ccw(c4.48,40.056) 5.489,39.047 ; S7.2@4.189,49.341 cw(c4.48,47.944) 5.489,48.953 ; S7.2@4.192,37.75 5.988,39.546 ; S7.2@4.192,50.25 5.988,48.454 ; S7.2@4.267,39.032 ccw(c4.652,40.882) 5.988,39.546 ; S7.2@4.267,48.968 cw(c4.652,47.118) 5.988,48.454 ; S7.2@4.928,37.788 cw(c6.454,37.852) 5.374,38.932 ; S7.2@4.928,50.212 ccw(c6.454,50.148) 5.374,49.068 ; S7.2@5.308,37.804 cw(c7.633,37.901) 5.988,39.546 ; S7.2@5.308,50.196 ccw(c7.633,50.099) 5.988,48.454 ; 5.988,39.546 C14.1@5.988,43.9 5.988,48.454
KEY8: C15.1 S8.2 U1.33 | length 81.2
  Top Layer w0.254: U1.33@1.05,78.95 1.05,71.15 2.1,70.1 2.1,53.2 2.9,52.4 15.042,52.4 ; 15.388,52.054 cw(c14.091,50.758) S8.2@15.898,50.442 ; 15.464,51.978 ccw(c16.936,53.451) S8.2@16.978,51.369 ; S8.2@15.647,50.486 ccw(c13.502,50.86) 15.042,52.4 ; 15.734,51.708 cw(c14.68,50.655) S8.2@16.148,50.399 ; 15.885,51.557 ccw(c16.953,52.624) S8.2@16.983,51.115 ; S8.2@16.973,51.623 cw(c16.92,54.277) 15.042,52.4 ; S8.2@17.192,50.25 15.042,52.4
  Bottom Layer w0.381: S8.2@17.146,38.667 ccw(c17.405,40.296) 18.572,39.13 ; S8.2@17.146,49.333 cw(c17.405,47.704) 18.572,48.87 ; S8.2@17.192,37.75 19.1,39.658 ; S8.2@17.192,50.25 19.1,48.342 ; S8.2@17.206,39.043 ccw(c17.55,41.208) 19.1,39.658 ; S8.2@17.206,48.957 cw(c17.55,46.792) 19.1,48.342 ; S8.2@17.928,37.75 cw(c19.707,37.75) 18.449,39.007 ; S8.2@17.928,50.25 ccw(c19.707,50.25) 18.449,48.993 ; S8.2@18.309,37.75 cw(c21.007,37.75) 19.1,39.658 ; S8.2@18.309,50.25 ccw(c21.007,50.25) 19.1,48.342 ; 19.1,39.658 C15.1@19.1,43.9 19.1,48.342
KEY9: C16.1 S9.2 U1.21 | length 117.4
  Top Layer w0.254: S9.2@-21.996,33.861 ccw(c-21.984,35.76) -20.641,34.417 ; S9.2@-21.994,34.115 ccw(c-21.978,36.614) -20.211,34.847 ; S9.2@-21.993,34.369 ccw(c-21.973,37.468) -19.781,35.277 ; S9.2@-21.991,34.623 ccw(c-21.967,38.322) -19.352,35.706 ; S9.2@-21.808,33.25 -19.352,35.706 ; S9.2@-21.135,33.25 cw(c-19.51,33.25) -20.659,34.399 ; S9.2@-20.881,33.25 cw(c-18.643,33.25) -20.226,34.832 ; S9.2@-20.627,33.25 cw(c-17.776,33.25) -19.792,35.266 ; U1.21@-4.45,81.95 -7.325,81.95 -8.406,80.868 -8.406,71.713 -7.611,70.917 -3.473,70.917 -1.245,68.688 -1.245,36.13 -1.668,35.706 -19.352,35.706
  Bottom Layer w0.381: S9.2@-21.811,21.659 ccw(c-21.52,23.056) -20.511,22.047 ; S9.2@-21.811,32.341 cw(c-21.52,30.944) -20.511,31.953 ; S9.2@-21.808,20.75 -20.012,22.546 ; S9.2@-21.808,33.25 -20.012,31.454 ; S9.2@-21.733,22.032 ccw(c-21.348,23.882) -20.012,22.546 ; S9.2@-21.733,31.968 cw(c-21.348,30.118) -20.012,31.454 ; S9.2@-21.072,20.788 cw(c-19.546,20.852) -20.626,21.932 ; S9.2@-21.072,33.212 ccw(c-19.546,33.148) -20.626,32.068 ; S9.2@-20.692,20.804 cw(c-18.367,20.901) -20.012,22.546 ; S9.2@-20.692,33.196 ccw(c-18.367,33.099) -20.012,31.454 ; -20.012,22.546 C16.1@-20.012,27 -20.012,31.454
KEY10: C17.1 S10.2 U1.22 | length 102.1
  Top Layer w0.254: S10.2@-8.916,33.855 ccw(c-8.742,35.116) -7.842,34.216 ; S10.2@-8.882,34.107 ccw(c-8.654,35.751) -7.481,34.577 ; S10.2@-8.847,34.358 ccw(c-8.567,36.386) -7.119,34.939 ; S10.2@-8.812,34.61 ccw(c-8.479,37.021) -6.758,35.3 ; S10.2@-8.808,33.25 -6.758,35.3 ; S10.2@-8.135,33.25 cw(c-6.51,33.25) -7.659,34.399 ; S10.2@-7.881,33.25 cw(c-5.643,33.25) -7.226,34.832 ; S10.2@-7.627,33.25 cw(c-4.776,33.25) -6.792,35.266 ; U1.22@-4.45,81.45 -7.25,81.45 -8,80.7 -8,71.881 -7.442,71.323 -3.305,71.323 -0.838,68.857 -0.838,35.962 -1.5,35.3 -6.758,35.3
  Bottom Layer w0.381: S10.2@-8.811,21.659 ccw(c-8.52,23.056) -7.511,22.047 ; S10.2@-8.811,32.341 cw(c-8.52,30.944) -7.511,31.953 ; S10.2@-8.808,20.75 -7.012,22.546 ; S10.2@-8.808,33.25 -7.012,31.454 ; S10.2@-8.733,22.032 ccw(c-8.348,23.882) -7.012,22.546 ; S10.2@-8.733,31.968 cw(c-8.348,30.118) -7.012,31.454 ; S10.2@-8.072,20.788 cw(c-6.546,20.852) -7.626,21.932 ; S10.2@-8.072,33.212 ccw(c-6.546,33.148) -7.626,32.068 ; S10.2@-7.692,20.804 cw(c-5.367,20.901) -7.012,22.546 ; S10.2@-7.692,33.196 ccw(c-5.367,33.099) -7.012,31.454 ; -7.012,22.546 C17.1@-7.012,27 -7.012,31.454
KEY11: C18.1 S11.2 U1.28 | length 75
  Top Layer w0.254: U1.28@-1.45,78.95 -1.45,71.875 0.787,69.638 0.787,36.655 S11.2@4.192,33.25
  Bottom Layer w0.381: S11.2@4.189,21.659 ccw(c4.48,23.056) 5.489,22.047 ; S11.2@4.189,32.341 cw(c4.48,30.944) 5.489,31.953 ; S11.2@4.192,20.75 5.988,22.546 ; S11.2@4.192,33.25 5.988,31.454 ; S11.2@4.267,22.032 ccw(c4.652,23.882) 5.988,22.546 ; S11.2@4.267,31.968 cw(c4.652,30.118) 5.988,31.454 ; S11.2@4.928,20.788 cw(c6.454,20.852) 5.374,21.932 ; S11.2@4.928,33.212 ccw(c6.454,33.148) 5.374,32.068 ; S11.2@5.308,20.804 cw(c7.633,20.901) 5.988,22.546 ; S11.2@5.308,33.196 ccw(c7.633,33.099) 5.988,31.454 ; 5.988,22.546 C18.1@5.988,27 5.988,31.454
KEY12: C19.1 S12.2 U1.29 | length 100.1
  Top Layer w0.254: U1.29@-0.95,78.95 -0.95,71.95 1.194,69.806 1.194,36.823 2.417,35.6 14.842,35.6 ; 14.984,35.458 ccw(c17,37.474) S12.2@17,34.623 ; 15.222,35.22 cw(c13.589,33.588) S12.2@15.886,33.36 ; 15.417,35.024 ccw(c17,36.607) S12.2@17,34.369 ; 15.601,34.841 cw(c14.28,33.52) S12.2@16.139,33.335 ; S12.2@15.634,33.385 ccw(c12.899,33.656) 14.842,35.6 ; 15.851,34.591 ccw(c17,35.74) S12.2@17,34.115 ; 15.98,34.462 cw(c14.97,33.451) S12.2@16.392,33.31 ; S12.2@17.192,33.25 14.842,35.6
  Bottom Layer w0.381: S12.2@17.189,21.659 ccw(c17.48,23.056) 18.489,22.047 ; S12.2@17.189,32.341 cw(c17.48,30.944) 18.489,31.953 ; S12.2@17.192,20.75 18.988,22.546 ; S12.2@17.192,33.25 18.988,31.454 ; S12.2@17.267,22.032 ccw(c17.652,23.882) 18.988,22.546 ; S12.2@17.267,31.968 cw(c17.652,30.118) 18.988,31.454 ; S12.2@17.928,20.788 cw(c19.454,20.852) 18.374,21.932 ; S12.2@17.928,33.212 ccw(c19.454,33.148) 18.374,32.068 ; S12.2@18.308,20.804 cw(c20.633,20.901) 18.988,22.546 ; S12.2@18.308,33.196 ccw(c20.633,33.099) 18.988,31.454 ; 18.988,22.546 C19.1@18.988,27 18.988,31.454
KEY13: C20.1 S13.2 U1.25 | length 115.2
  Top Layer w0.254: S13.2@-15.5,16.25 -13.15,18.6 -1.598,18.6 -0.432,19.766 -0.432,69.133 -2.95,71.651 U1.25@-2.95,78.95 ; S13.2@-15.5,17.115 ccw(c-15.5,19.203) -14.023,17.727 ccw(c-12.547,16.25) S13.2@-14.635,16.25 ; S13.2@-15.5,17.369 ccw(c-15.5,20.071) -13.59,18.16 ccw(c-11.68,16.25) S13.2@-14.381,16.25 ; S13.2@-15.5,17.623 ccw(c-15.5,20.938) -13.156,18.594 ccw(c-10.812,16.25) S13.2@-14.127,16.25
  Bottom Layer w0.381: S13.2@-15.5,3.75 -13.704,5.546 ; S13.2@-15.5,16.25 -13.704,14.454 ; S13.2@-15.346,4.666 ccw(c-15.133,5.93) -14.227,5.023 ccw(c-13.32,4.117) S13.2@-14.584,3.904 ; S13.2@-15.346,15.334 cw(c-15.133,14.07) -14.227,14.977 cw(c-13.32,15.883) S13.2@-14.584,16.096 ; S13.2@-15.283,5.041 ccw(c-14.983,6.825) -13.704,5.546 ; S13.2@-15.283,14.959 cw(c-14.983,13.175) -13.704,14.454 ; S13.2@-14.209,3.967 cw(c-12.425,4.267) -13.704,5.546 ; S13.2@-14.209,16.033 ccw(c-12.425,15.733) -13.704,14.454 ; -13.704,5.546 C20.1@-13.704,10 -13.704,14.454
KEY14: C21.1 S14.2 U1.26 | length 106.7
  Top Layer w0.254: S14.2@-2.5,16.25 -2.5,17.1 -0.026,19.574 ; S14.2@-2.5,17.623 ccw(c-2.5,18.886) -1.607,17.993 ; U1.26@-2.45,78.95 -2.45,71.726 -0.026,69.301 -0.026,19.574 ; S14.2@-2.398,16.262 cw(c-0.641,16.459) -1.891,17.709 ; S14.2@-2.145,16.29 cw(c0.03,16.535) -1.518,18.082 ; S14.2@-1.893,16.318 cw(c0.7,16.61) -1.145,18.455 ; S14.2@-1.64,16.347 cw(c1.371,16.685) -0.772,18.828 ; S14.2@-1.388,16.375 cw(c2.042,16.761) -0.399,19.201 ; S14.2@-1.136,16.403 cw(c2.712,16.836) -0.026,19.574
  Bottom Layer w0.381: S14.2@-2.5,3.75 -0.704,5.546 ; S14.2@-2.5,16.25 -0.704,14.454 ; S14.2@-2.346,4.666 ccw(c-2.133,5.93) -1.227,5.023 ccw(c-0.32,4.117) S14.2@-1.584,3.904 ; S14.2@-2.346,15.334 cw(c-2.133,14.07) -1.227,14.977 cw(c-0.32,15.883) S14.2@-1.584,16.096 ; S14.2@-2.283,5.041 ccw(c-1.983,6.825) -0.704,5.546 ; S14.2@-2.283,14.959 cw(c-1.983,13.175) -0.704,14.454 ; S14.2@-1.209,3.967 cw(c0.575,4.267) -0.704,5.546 ; S14.2@-1.209,16.033 ccw(c0.575,15.733) -0.704,14.454 ; -0.704,5.546 C21.1@-0.704,10 -0.704,14.454
KEY15: C22.1 S15.2 U1.27 | length 108.6
  Top Layer w0.254: U1.27@-1.95,78.95 -1.95,71.801 0.381,69.47 0.381,19.819 1.8,18.4 8.35,18.4 ; S15.2@9.13,16.336 ccw(c6.455,16.505) 8.35,18.4 ; S15.2@9.383,16.32 ccw(c7.203,16.458) 8.748,18.002 ccw(c10.292,19.547) S15.2@10.43,17.367 ; S15.2@9.637,16.304 ccw(c7.952,16.411) 9.146,17.604 ccw(c10.339,18.798) S15.2@10.446,17.113 ; S15.2@10.414,17.62 cw(c10.245,20.295) 8.35,18.4 ; S15.2@10.5,16.25 8.35,18.4
  Bottom Layer w0.381: S15.2@10.5,3.75 12.296,5.546 ; S15.2@10.5,16.25 12.296,14.454 ; S15.2@10.654,4.666 ccw(c10.867,5.93) 11.773,5.023 ccw(c12.68,4.117) S15.2@11.416,3.904 ; S15.2@10.654,15.334 cw(c10.867,14.07) 11.773,14.977 cw(c12.68,15.883) S15.2@11.416,16.096 ; S15.2@10.717,5.041 ccw(c11.017,6.825) 12.296,5.546 ; S15.2@10.717,14.959 cw(c11.017,13.175) 12.296,14.454 ; S15.2@11.791,3.967 cw(c13.575,4.267) 12.296,5.546 ; S15.2@11.791,16.033 ccw(c13.575,15.733) 12.296,14.454 ; 12.296,5.546 C22.1@12.296,10 12.296,14.454
LEDKEY: R1.2 U1.43 | length 26.9
  Top Layer w0.254: R1.2@-10.907,95.862 cw(c-11.287,95.482) -10.749,95.482 cw(c-10.211,95.482) R1.2@-10.591,95.862 ; R1.2@-10.749,96.02 -10.749,91.14 v1(-10.033,90.424) ; v1@-10.16,90.424 ccw(c-10.467,90.424) -10.25,90.641 ccw(c-10.033,90.858) v1@-10.033,90.551 ; v1(1.016,83.439) 4.039,83.439 U1.43@4.05,83.45 ; v1@1.106,83.349 cw(c1.323,83.132) 1.323,83.439 cw(c1.323,83.746) v1@1.106,83.529
  Bottom Layer w0.254: v1@-10.033,90.297 cw(c-10.033,89.99) -9.816,90.207 cw(c-9.599,90.424) v1@-9.906,90.424 ; v1(-10.033,90.424) -6.299,86.69 -0.076,86.69 0.381,86.233 0.381,84.074 v1(1.016,83.439) ; v1@0.889,83.439 ccw(c0.582,83.439) 0.799,83.656 ccw(c1.016,83.873) v1@1.016,83.566
LEDPOW: R2.2 U1.45 | length 24.6
  Top Layer w0.254: R2.2@-8.886,95.862 cw(c-9.267,95.482) -8.729,95.482 cw(c-8.19,95.482) R2.2@-8.571,95.862 ; R2.2@-8.729,96.02 -8.729,90.898 v1(-8.255,90.424) ; v1@-8.382,90.424 ccw(c-8.689,90.424) -8.472,90.641 ccw(c-8.255,90.858) v1@-8.255,90.551 ; v1(1.27,84.201) 2.667,84.201 2.916,84.45 U1.45@4.05,84.45 ; v1@1.36,84.111 cw(c1.577,83.894) 1.577,84.201 cw(c1.577,84.508) v1@1.36,84.291
  Bottom Layer w0.254: v1@-8.255,90.297 cw(c-8.255,89.99) -8.038,90.207 cw(c-7.821,90.424) v1@-8.128,90.424 ; v1(-8.255,90.424) -4.928,87.097 0.092,87.097 0.787,86.401 0.787,84.684 v1(1.27,84.201) ; v1@1.143,84.201 ccw(c0.836,84.201) 1.053,84.418 ccw(c1.27,84.635) v1@1.27,84.328
LEDTEST: R3.2 U1.46 | length 22.1
  Top Layer w0.254: R3.2@-6.866,95.862 cw(c-7.247,95.482) -6.708,95.482 cw(c-6.17,95.482) R3.2@-6.551,95.862 ; v1@-6.821,90.514 ccw(c-7.092,90.785) -6.708,90.785 ; v1(-6.731,90.424) -6.708,90.447 R3.2@-6.708,96.02 ; v1(1.524,84.861) 1.613,84.95 U1.46@4.05,84.95 ; v1@1.614,84.772 cw(c2.045,84.341) 2.045,84.95
  Bottom Layer w0.254: v1@-6.731,90.297 cw(c-6.731,89.99) -6.514,90.207 cw(c-6.297,90.424) v1@-6.604,90.424 ; v1(-6.731,90.424) -3.81,87.503 0.26,87.503 1.194,86.57 1.194,85.166 1.499,84.861 v1(1.524,84.861) ; 1.264,85.096 ccw(c1.524,85.356) v1@1.524,84.988 ; 1.325,85.035 cw(c1.152,84.861) v1@1.397,84.861
NetC29_1: C29.1 R20.2 R22.1 U3.4 | length 5.6
  Bottom Layer w0.508: R20.2@-0.976,95.719 R22.1@0.624,95.719 C29.1@2.324,95.719 2.474,95.569 U3.4@4.099,95.569 ; C29.1@2.507,95.752 ccw(c2.947,96.192) 2.947,95.569
NetD1_2: D1.2 R1.1 | length 3.7
  Top Layer w0.305: D1.2@-10.924,99.428 cw(c-11.347,99.005) -10.749,99.005 cw(c-10.151,99.005) D1.2@-10.574,99.428 ; R1.1@-10.889,97.76 ccw(c-11.226,98.097) -10.749,98.097 ccw(c-10.272,98.097) R1.1@-10.609,97.76 ; R1.1@-10.749,97.62 D1.2@-10.749,99.603
NetD2_2: D2.2 R2.1 | length 3.7
  Top Layer w0.305: D2.2@-8.904,99.428 cw(c-9.326,99.005) -8.729,99.005 cw(c-8.131,99.005) D2.2@-8.554,99.428 ; R2.1@-8.868,97.76 ccw(c-9.206,98.097) -8.729,98.097 ccw(c-8.252,98.097) R2.1@-8.589,97.76 ; R2.1@-8.729,97.62 D2.2@-8.729,99.603
NetD3_2: D3.2 R3.1 | length 3.7
  Top Layer w0.305: D3.2@-6.883,99.428 cw(c-7.306,99.005) -6.708,99.005 cw(c-6.111,99.005) D3.2@-6.533,99.428 ; R3.1@-6.848,97.76 ccw(c-7.185,98.097) -6.708,98.097 ccw(c-6.231,98.097) R3.1@-6.569,97.76 ; R3.1@-6.708,97.62 D3.2@-6.708,99.603
NetD4_2: D4.2 R12.2 | length 2.6
  Bottom Layer w0.508: D4.2@-11.3,98.9 -11.14,99.06 R12.2@-9.309,99.06 ; D4.2@-11.197,99.253 ccw(c-10.73,99.72) -10.73,99.06
NetJ2_3: J2.3 R7.2 | length 10.8
  Top Layer w0.254: J2.3@-26,85.8 R7.2@-17.8,85.8 ; J2.3@-25.666,85.466 cw(c-24.858,84.658) -24.858,85.8 cw(c-24.858,86.942) J2.3@-25.666,86.134 ; R7.2@-17.958,85.642 ccw(c-18.338,85.262) -18.338,85.8 ccw(c-18.338,86.338) R7.2@-17.958,85.958
NetJ2_4: J2.4 R8.2 | length 10.8
  Top Layer w0.254: J2.4@-26,87.3 R8.2@-17.8,87.3 ; J2.4@-25.666,86.966 cw(c-24.858,86.158) -24.858,87.3 cw(c-24.858,88.442) J2.4@-25.666,87.634 ; R8.2@-17.958,87.142 ccw(c-18.338,86.762) -18.338,87.3 ccw(c-18.338,87.838) R8.2@-17.958,87.458
NetJ2_5: J2.5 R9.2 | length 10.8
  Top Layer w0.254: J2.5@-26,88.8 R9.2@-17.8,88.8 ; J2.5@-25.666,88.466 cw(c-24.858,87.658) -24.858,88.8 cw(c-24.858,89.942) J2.5@-25.666,89.134 ; R9.2@-17.958,88.642 ccw(c-18.338,88.262) -18.338,88.8 ccw(c-18.338,89.338) R9.2@-17.958,88.958
NetJ2_6: J2.6 R10.2 | length 10.7
  Top Layer w0.254: J2.6@-26,90.3 R10.2@-17.9,90.3 ; J2.6@-25.666,89.966 cw(c-24.858,89.158) -24.858,90.3 cw(c-24.858,91.442) J2.6@-25.666,90.634 ; R10.2@-17.958,90.142 ccw(c-18.338,89.762) -18.338,90.3 ccw(c-18.338,90.838) R10.2@-17.958,90.458
NetJ2_7: J2.7 R11.2 | length 10.8
  Top Layer w0.254: J2.7@-26,91.8 R11.2@-17.8,91.8 ; J2.7@-25.666,91.466 cw(c-24.858,90.658) -24.858,91.8 cw(c-24.858,92.942) J2.7@-25.666,92.134 ; R11.2@-17.958,91.642 ccw(c-18.338,91.262) -18.338,91.8 ccw(c-18.338,92.338) R11.2@-17.958,91.958
NetQ1_1: Q1.1 R14.2 R15.1 | length 7
  Bottom Layer w0.508: R14.2@-2.476,102.9 R15.1@-2.476,101.3 -1.642,101.3 Q1.1@-0.092,99.75 ; -1.604,101.262 cw(c-3.117,99.75) Q1.1@-0.978,99.75 ; -0.737,100.395 cw(c-1.383,99.75) Q1.1@-0.47,99.75
NetQ2_1: Q2.1 R16.2 R17.1 | length 8.6
  Bottom Layer w0.305: Q2.1@22.2,97.25 Q2.1@22.338,97.112
  Bottom Layer w0.381: Q2.1@22.338,97.112 24.2,97.112 R16.2@25.9,97.112 ; Q2.1@22.349,97.407 ccw(c23.062,98.12) 23.062,97.112 ; Q2.1@22.619,97.676 ccw(c23.982,99.039) R17.1@23.982,97.112 ; 23.214,97.112 ccw(c23.214,98.205) R17.1@23.987,97.432 ; R17.1@24.413,97.432 ccw(c25.186,98.205) 25.186,97.112 ; 24.914,97.112 ccw(c24.914,98.205) R16.2@25.687,97.432
NetQ2_3: Q2.3 Q3.3 R15.2 | length 42
  Bottom Layer w0.305: R15.2@-2.483,99.704 ccw(c-1.771,99.68) -2.275,99.176 ; R15.2@-2.476,99.7 -2.476,99.377 -1.778,98.679 ; R15.2@-2.179,99.693 ccw(c-0.809,99.648) -1.778,98.679 ; Q3.3@17.954,96.776 ccw(c17.361,97.37) 18.2,97.37 ccw(c19.039,97.37) Q3.3@18.446,96.776 ; Q3.3@18.646,96.285 cw(c19.183,95.747) 19.183,96.507 ; Q3.3@18.646,96.776 ccw(c19.295,97.426) 19.295,96.507 ; Q2.3@19.554,96.262 ccw(c18.961,95.668) 18.961,96.507 ccw(c18.961,97.347) Q2.3@19.554,96.753 ; Q2.3@20,96.507 18.223,96.507 Q3.3@18.2,96.531 18.2,97.6 17.3,98.5 12.4,98.5 11.45,99.45 11.45,104.95 11.168,105.232 2.616,105.232 1.905,104.521 1.905,99.187 1.397,98.679 -1.778,98.679
NetQ3_1: Q3.1 R18.2 R19.1 | length 6.5
  Bottom Layer w0.381: R18.2@12.2,95.719 R19.1@14,95.719 15.631,95.719 Q3.1@15.85,95.5 ; R18.2@12.413,95.606 cw(c12.685,95.334) 12.685,95.719 cw(c12.685,96.104) R18.2@12.413,95.832 ; R19.1@13.787,95.606 ccw(c13.515,95.334) 13.515,95.719 ccw(c13.515,96.104) R19.1@13.787,95.832 ; R19.1@14.213,95.606 cw(c14.485,95.334) 14.485,95.719 cw(c14.485,96.104) R19.1@14.213,95.832 ; 14.719,95.719 cw(c14.719,94.499) Q3.1@15.581,95.362
NetQ4_1: Q4.1 R27.1 R29.2 | length 6.2
  Top Layer w0.381: R27.1@15.55,89.85 Q4.1@19.3,89.85 ; R27.1@15.713,89.687 cw(c16.106,89.294) 16.106,89.85 ; 16.694,89.85 cw(c16.694,89.294) R29.2@17.087,89.687 ; R29.2@17.513,89.687 cw(c17.906,89.294) 17.906,89.85 ; Q4.1@18.881,89.631 ccw(c18.353,89.103) 18.353,89.85 ccw(c18.353,90.597) Q4.1@18.881,90.069
NetQ5_1: Q5.1 R30.1 R31.2 | length 7.8
  Top Layer w0.305: R30.1@15.494,77.94 15.672,77.94 R31.2@17.272,79.54 17.422,79.69 Q5.1@19.347,79.69 ; R30.1@15.594,78.138 ccw(c15.594,78.803) 16.064,78.332 ; 16.764,79.032 ccw(c16.256,79.54) R31.2@16.974,79.54 ; R31.2@17.512,79.4 cw(c18.211,78.701) 18.211,79.69 ; Q5.1@18.901,79.444 ccw(c18.308,78.851) 18.308,79.69 ccw(c18.308,80.529) Q5.1@18.901,79.936
NetR4_1: R4.1 R5.2 | length 3.7
  Top Layer w0.305: R4.1@-12.902,97.887 ccw(c-13.239,98.224) -12.762,98.224 ccw(c-12.285,98.224) R4.1@-12.622,97.887 ; R5.2@-12.902,99.79 cw(c-13.239,99.453) -12.762,99.453 cw(c-12.285,99.453) R5.2@-12.622,99.79 ; R4.1@-12.762,97.747 R5.2@-12.762,99.93
NetR12_1: R12.1 U2.1 | length 7.9
  Bottom Layer w0.305: U2.1@-9.754,95.104 ccw(c-10.006,95.356) -9.65,95.356 ccw(c-9.294,95.356) U2.1@-9.546,95.104 ; U2.1@-9.65,94.775 -9.65,95.629 -10.541,96.52 -10.541,97.917 -10.287,98.171 -8.598,98.171 R12.1@-7.709,99.06 ; -8.217,98.552 cw(c-7.709,98.044) R12.1@-7.709,98.762
NetR13_2: R13.2 U2.5 | length 2.6
  Bottom Layer w0.508: U2.5@-9.65,97.225 -8.625,97.225 R13.2@-7.8,96.4 ; R13.2@-8.135,96.735 cw(c-8.469,96.4) R13.2@-7.996,96.4
NetR16_1: R16.1 S16.1 | length 20.2
  Bottom Layer w0.254: S16.1@18.52,104.65 cw(c17.402,104.498) 18.2,103.7 ; S16.1@18.772,104.685 cw(c18.039,104.585) 18.562,104.062 cw(c19.085,103.539) S16.1@19.185,104.272 ; S16.1@19.15,104.02 ccw(c18.998,102.902) 18.2,103.7 ; S16.1@19.25,104.75 18.2,103.7 ; 25.349,96.27 cw(c24.797,95.719) R16.1@25.577,95.719 ; R16.1@25.59,96.029 ccw(c25.8,96.239) R16.1@25.8,95.942 ; R16.1@25.796,95.615 R16.1@25.9,95.512 ; R16.1@25.9,95.719 25.119,96.5 21.4,96.5 21.1,96.8 21.1,97.4 20.7,97.8 19.1,97.8 18.2,98.7 18.2,103.7
NRST: C5.1 U1.7 | length 5.1
  Top Layer w0.254: C5.1@-0.922,89.828 cw(c-2.063,88.687) -0.45,88.687 ; C5.1@-0.8,90.1 -0.45,89.75 ; C5.1@-0.743,90.007 cw(c-1.449,89.301) -0.45,89.301 ; C5.1@-0.723,89.795 cw(c-0.618,89.582) -0.45,89.75 ; U1.7@-0.45,87.45 -0.45,89.75
POWEN: R18.1 U1.42 | length 22.3
  Top Layer w0.254: U1.42@4.05,82.95 8.35,82.95 11.6,86.2 v1(11.6,94.7) ; v1@11.51,94.61 cw(c11.293,94.393) 11.6,94.393 cw(c11.907,94.393) v1@11.69,94.61
  Bottom Layer w0.254: 11.408,95.47 ccw(c12.37,95.47) v1@11.69,94.79 ; 11.564,96.564 ccw(c10.81,97.319) R18.1@11.877,97.319 ; v1(11.6,94.7) 11.408,94.892 11.408,96.408 12.1,97.1 R18.1@12.2,97.1